# EAGLE board proto (EAGLE 9.3.2), part 1 of 2
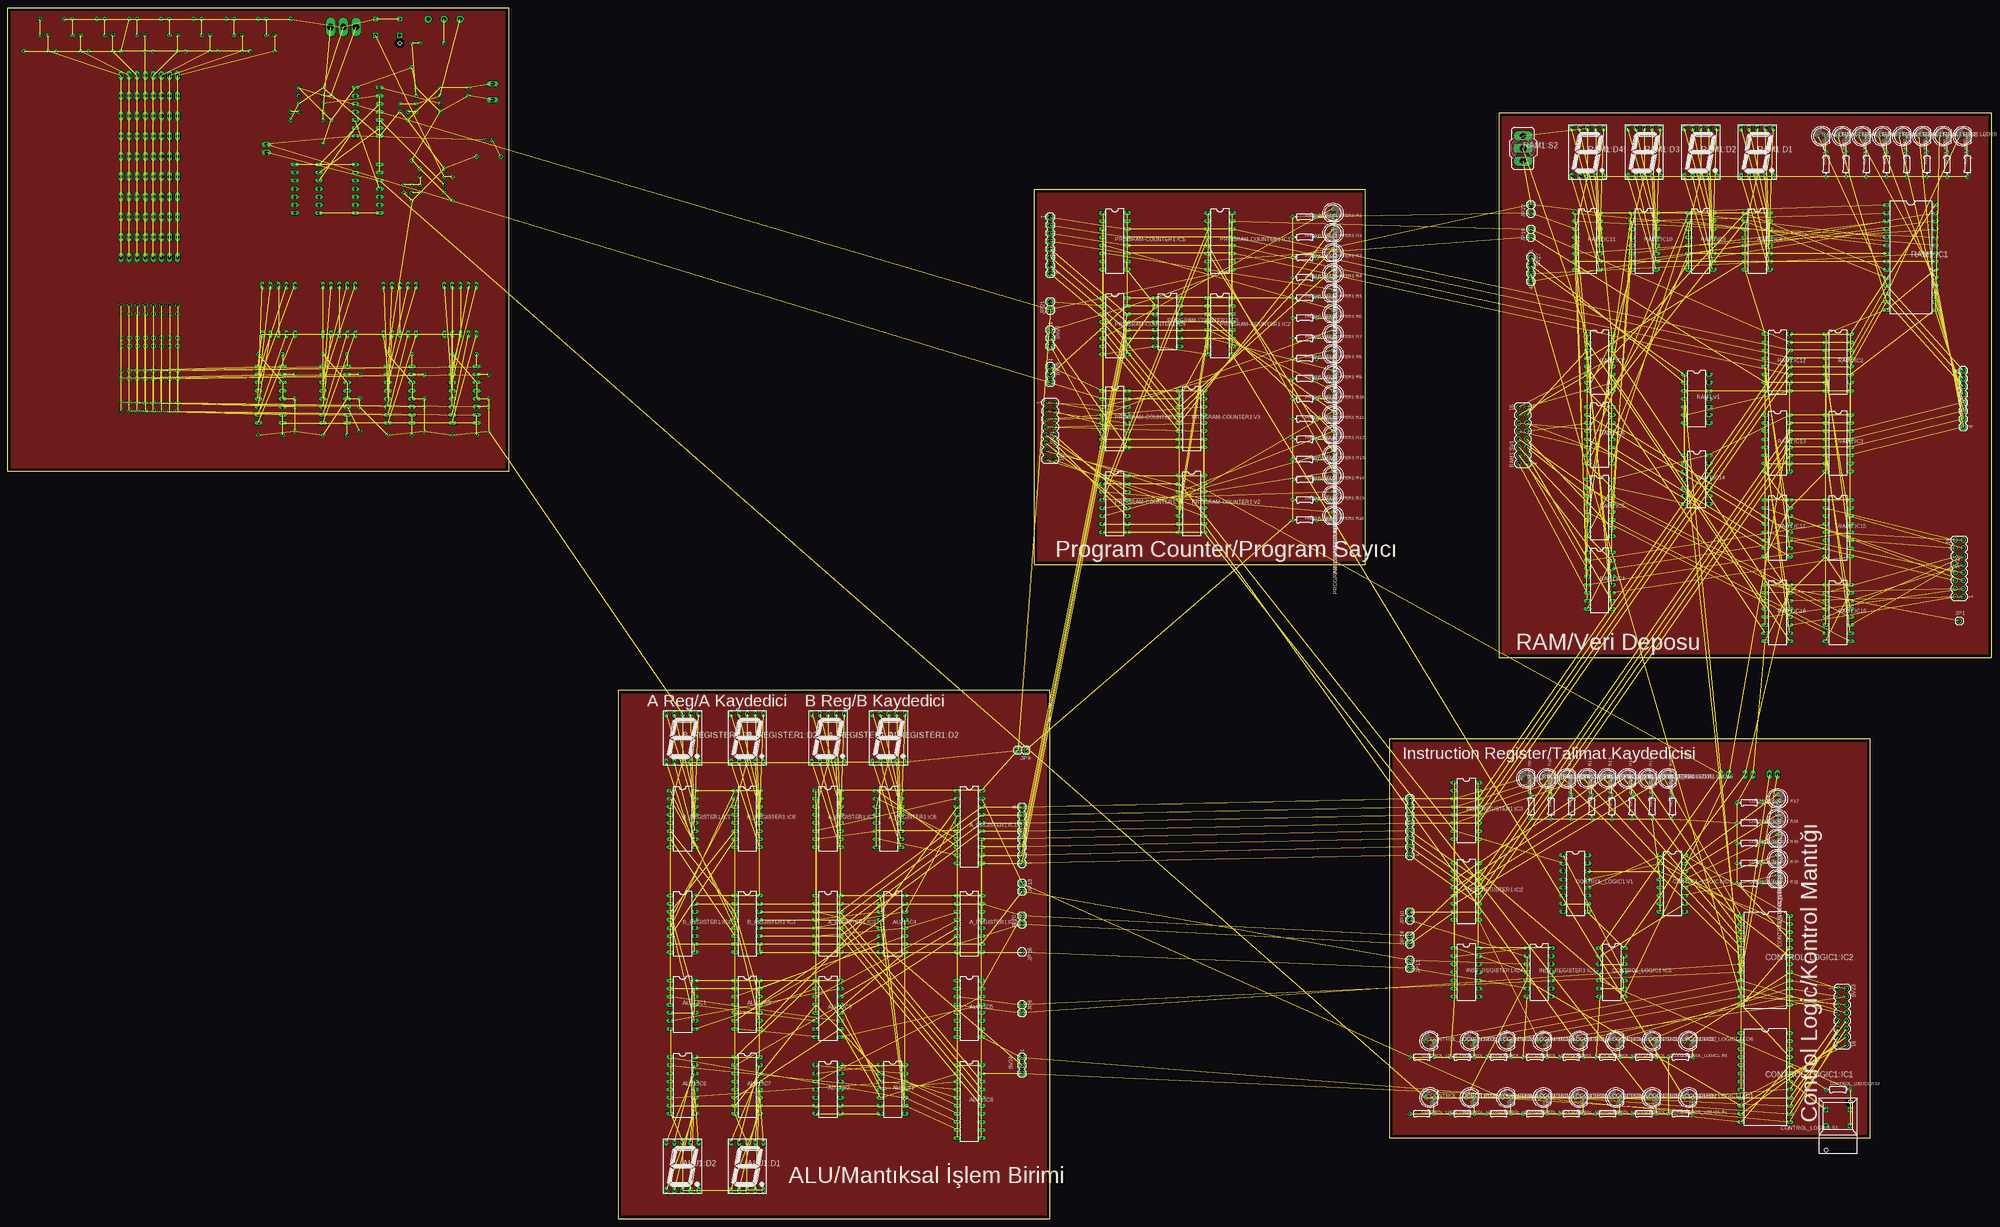
[diagram p0: board, top side]
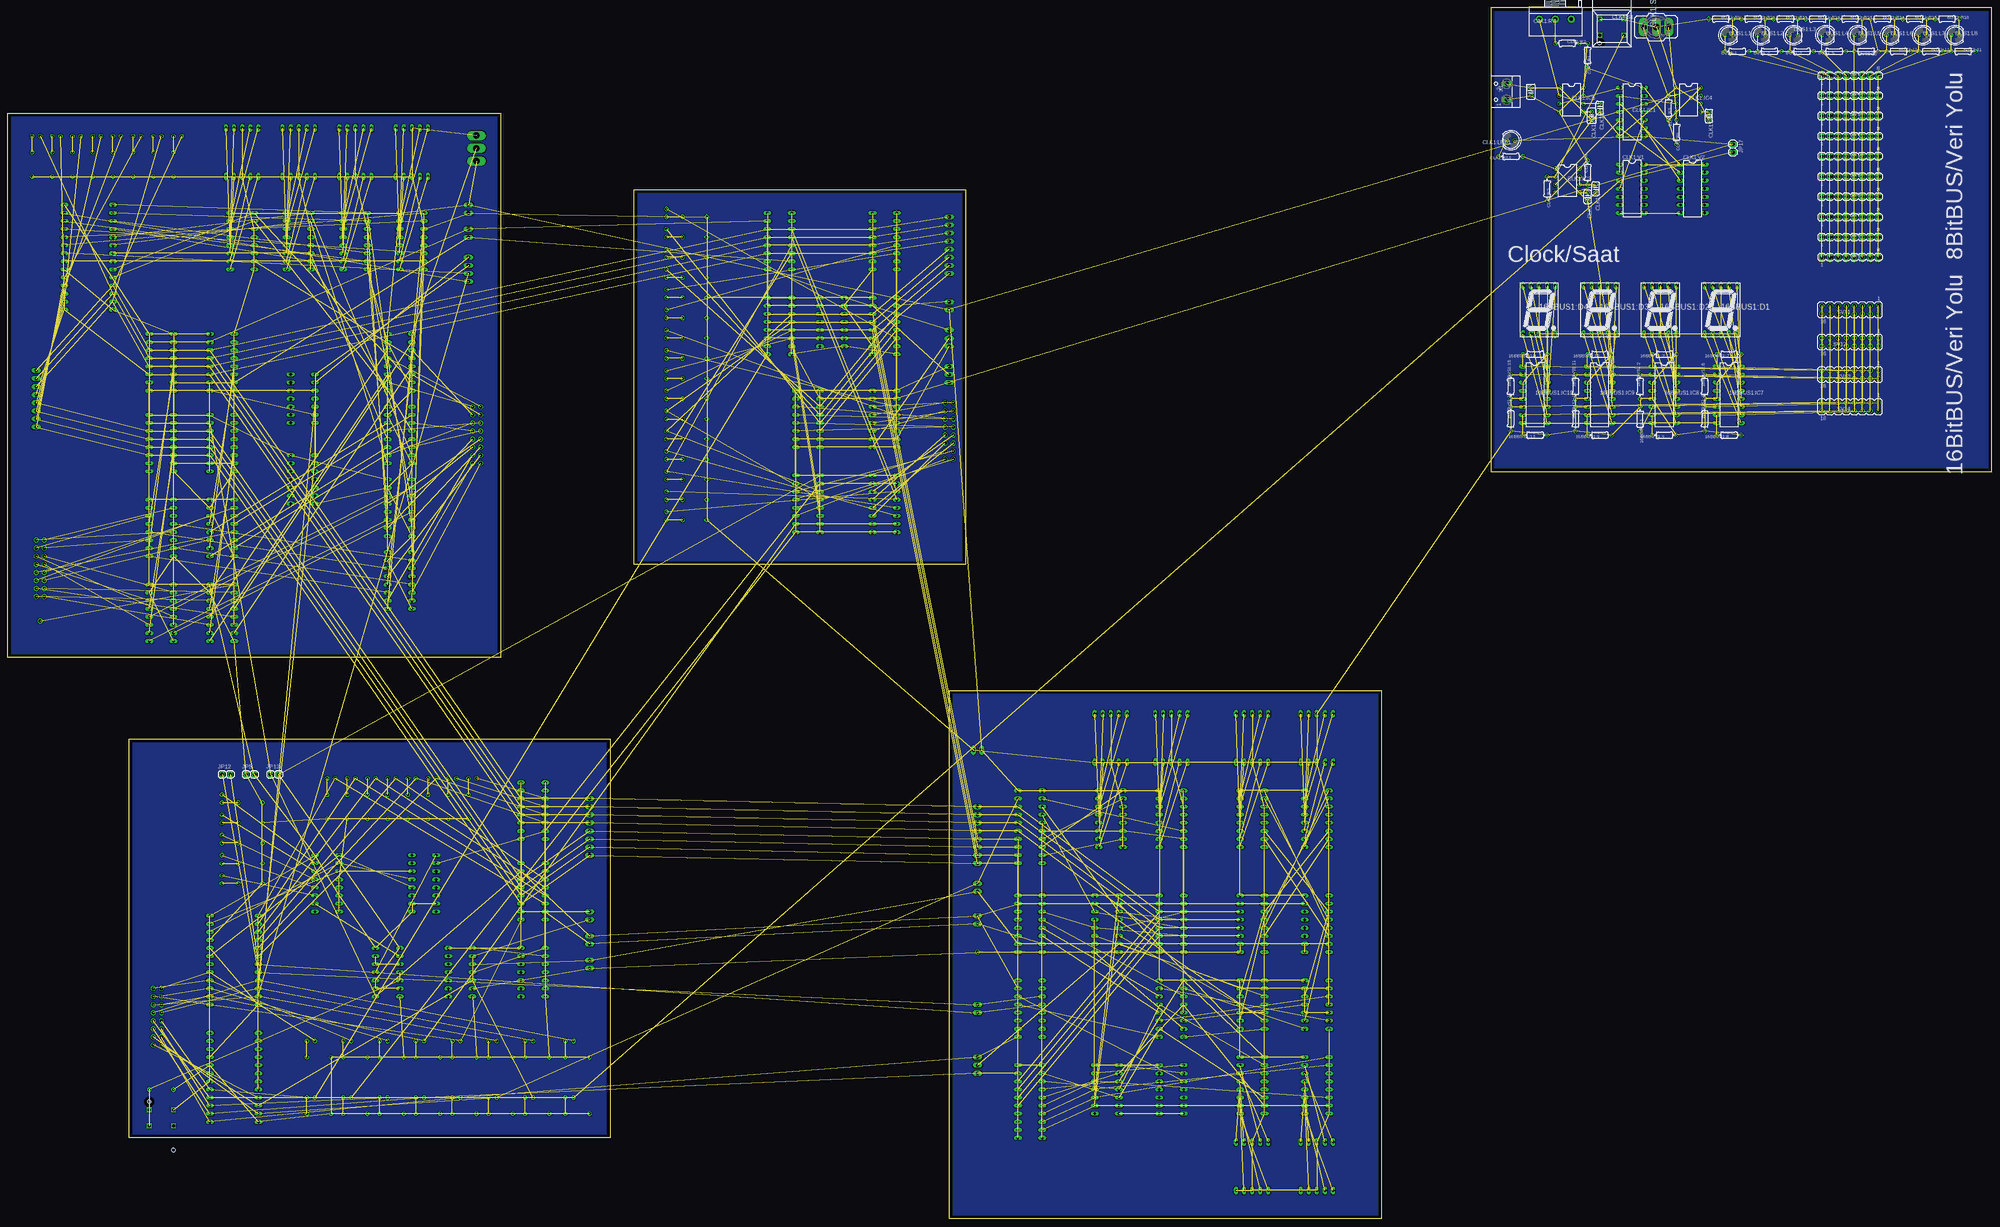
[diagram p1: board, bottom side, seen from below]

Size 623.53 x 380.67 mm. Coordinates in mm from the lower left corner, seen from the top.
Outline: 434.32,25.4 585.43,25.4 585.43,150.8 434.32,150.8 434.32,25.4
Outline: 322.56,205.74 426.68,205.74 426.68,323.52 322.56,323.52 322.56,205.74
Outline: 468.61,176.53 623.53,176.53 623.53,347.65 468.61,347.65 468.61,176.53
Outline: 191.75,0 327.62,0 327.62,166.04 191.75,166.04 191.75,0
Outline: 157.46,234.95 0,234.95 0,380.67 157.46,380.67 157.46,234.95
Copper layers (1*16): Top 0.035mm / dielectric 1.5mm / Bottom 0.035mm
Design rules "default *": minimum track width 9mil, minimum drill 0.35mm, track to track 9mil, track to pad 9mil, pad to pad 6mil, via to via 6mil, smd to smd 6mil, copper to edge 40mil, drill to drill 6mil, minimum pad ring 10mil, minimum via ring 8mil, stop-mask expansion 4mil, vias tented up to drill 0mil, thermal gap 10mil
Net classes: 0 default: width 0.254 mm

## Footprints (pad centres in the part's own frame; a part is rotated, then mirrored left to right if it is on the bottom)
0204/7 = drill 0.813 octagon: 1 -3.81,0; 2 3.81,0
7SEG-13 = drill 0.813 long: 1 -5.08,-7.62; 2 -2.54,-7.62; 3 0,-7.62; 4 2.54,-7.62; 5 5.08,-7.62; 6 5.08,7.62; 7 2.54,7.62; 8 0,7.62; 9 -2.54,7.62; 10 -5.08,7.62
DIL16 = drill 0.813 long: 1 -8.89,-3.81; 2 -6.35,-3.81; 3 -3.81,-3.81; 4 -1.27,-3.81; 5 1.27,-3.81; 6 3.81,-3.81; 7 6.35,-3.81; 8 8.89,-3.81; 9 8.89,3.81; 10 6.35,3.81; 11 3.81,3.81; 12 1.27,3.81; 13 -1.27,3.81; 14 -3.81,3.81; 15 -6.35,3.81; 16 -8.89,3.81
DIL20 = drill 0.813 long: 1 -11.43,-3.81; 2 -8.89,-3.81; 3 -6.35,-3.81; 4 -3.81,-3.81; 5 -1.27,-3.81; 6 1.27,-3.81; 7 3.81,-3.81; 8 6.35,-3.81; 9 8.89,-3.81; 10 11.43,-3.81; 11 11.43,3.81; 12 8.89,3.81; 13 6.35,3.81; 14 3.81,3.81; 15 1.27,3.81; 16 -1.27,3.81; 17 -3.81,3.81; 18 -6.35,3.81; 19 -8.89,3.81; 20 -11.43,3.81
DIL14 = drill 0.813 long: 1 -7.62,-3.81; 2 -5.08,-3.81; 3 -2.54,-3.81; 4 0,-3.81; 5 2.54,-3.81; 6 5.08,-3.81; 7 7.62,-3.81; 8 7.62,3.81; 9 5.08,3.81; 10 2.54,3.81; 11 0,3.81; 12 -2.54,3.81; 13 -5.08,3.81; 14 -7.62,3.81
LED5MM = drill 0.813 octagon: A -1.27,0; K 1.27,0
C025-025X050 = drill 0.813 octagon: 1 -1.27,0; 2 1.27,0
C025-024X044 = drill 0.813 octagon: 1 -1.27,0; 2 1.27,0
DIL08 = drill 0.813 pad 1.27: 1 -3.81,-3.81; 2 -1.27,-3.81; 3 1.27,-3.81; 4 3.81,-3.81; 5 3.81,3.81; 6 1.27,3.81; 7 -1.27,3.81; 8 -3.81,3.81
3RP/1610N = drill 1.2 pad 2.184: 1 -5,0; 2 0,0; 3 5,0
5501 = drill 0.9 pad 1.5 square: 1A 0,3.81; 1B 0,-3.81; NC 5.08,-3.81; NO 5.08,3.81 | hole 1.1: -7.62,3.81; 7.62,-3.81
320-916 = drill 2.007 long: 1 0,4.013; 2 0,0; 3 0,-4.013
DIL24 = drill 0.813 long: 1 -13.97,-7.62; 2 -11.43,-7.62; 3 -8.89,-7.62; 4 -6.35,-7.62; 5 -3.81,-7.62; 6 -1.27,-7.62; 7 1.27,-7.62; 8 3.81,-7.62; 9 6.35,-7.62; 10 8.89,-7.62; 11 11.43,-7.62; 12 13.97,-7.62; 13 13.97,7.62; 14 11.43,7.62; 15 8.89,7.62; 16 6.35,7.62; 17 3.81,7.62; 18 1.27,7.62; 19 -1.27,7.62; 20 -3.81,7.62; 21 -6.35,7.62; 22 -8.89,7.62; 23 -11.43,7.62; 24 -13.97,7.62
1X01 = drill 1.016 octagon: 1 0,0
1X02 = drill 1.016 long: 1 -1.27,0; 2 1.27,0
DIL28-6 = drill 0.813 long: 1 -16.51,-7.62; 2 -13.97,-7.62; 3 -11.43,-7.62; 4 -8.89,-7.62; 5 -6.35,-7.62; 6 -3.81,-7.62; 7 -1.27,-7.62; 8 1.27,-7.62; 9 3.81,-7.62; 10 6.35,-7.62; 11 8.89,-7.62; 12 11.43,-7.62; 13 13.97,-7.62; 14 16.51,-7.62; 15 16.51,7.62; 16 13.97,7.62; 17 11.43,7.62; 18 8.89,7.62; 19 6.35,7.62; 20 3.81,7.62; 21 1.27,7.62; 22 -1.27,7.62; 23 -3.81,7.62; 24 -6.35,7.62; 25 -8.89,7.62; 26 -11.43,7.62; 27 -13.97,7.62; 28 -16.51,7.62
MA08-2 = drill 1.016 octagon: 1 -8.89,-1.27; 2 -8.89,1.27; 3 -6.35,-1.27; 4 -6.35,1.27; 5 -3.81,-1.27; 6 -3.81,1.27; 7 -1.27,-1.27; 8 -1.27,1.27; 9 1.27,-1.27; 10 1.27,1.27; 11 3.81,-1.27; 12 3.81,1.27; 13 6.35,-1.27; 14 6.35,1.27; 15 8.89,-1.27; 16 8.89,1.27
MA08-1 = drill 1.016 long: 1 -8.89,0; 2 -6.35,0; 3 -3.81,0; 4 -1.27,0; 5 1.27,0; 6 3.81,0; 7 6.35,0; 8 8.89,0
MA03-1 = drill 1.016 long: 1 -2.54,0; 2 0,0; 3 2.54,0
MA04-1 = drill 1.016 long: 1 -3.81,0; 2 -1.27,0; 3 1.27,0; 4 3.81,0
W237-102 = drill 1.194 long: 1 -2.5,-1.27; 2 2.5,-1.27

## Placement (x,y rotation side)
16BBUS1:1  10k  [0204/7]  110.47,251.46 270 bottom
16BBUS1:2  10k  [0204/7]  110.47,261.62 90 bottom
16BBUS1:3  10k  [0204/7]  102.85,271.78 180 bottom
16BBUS1:4  10k  [0204/7]  90.15,251.46 90 bottom
16BBUS1:5  10k  [0204/7]  102.85,246.38 180 bottom
16BBUS1:6  10k  [0204/7]  90.15,261.62 90 bottom
16BBUS1:7  10k  [0204/7]  82.53,271.78 180 bottom
16BBUS1:8  10k  [0204/7]  82.53,246.38 180 bottom
16BBUS1:9  10k  [0204/7]  123.17,246.38 180 bottom
16BBUS1:10  10k  [0204/7]  123.17,271.78 180 bottom
16BBUS1:11  10k  [0204/7]  130.79,261.62 90 bottom
16BBUS1:12  10k  [0204/7]  130.79,251.46 90 bottom
16BBUS1:13  10k  [0204/7]  143.49,246.38 180 bottom
16BBUS1:14  10k  [0204/7]  143.49,271.78 180 bottom
16BBUS1:15  10k  [0204/7]  151.11,261.62 90 bottom
16BBUS1:16  10k  [0204/7]  151.11,251.46 90 bottom
16BBUS1:D1  [7SEG-13]  85.07,285.75 0 bottom
16BBUS1:D2  [7SEG-13]  104.12,285.75 0 bottom
16BBUS1:D3  [7SEG-13]  123.17,285.75 0 bottom
16BBUS1:D4  [7SEG-13]  142.22,285.75 0 bottom
16BBUS1:IC7  74LS47N  [DIL16]  82.53,259.08 270 bottom
16BBUS1:IC8  74LS47N  [DIL16]  102.85,259.08 270 bottom
16BBUS1:IC9  74LS47N  [DIL16]  123.17,259.08 270 bottom
16BBUS1:IC10  74LS47N  [DIL16]  143.49,259.08 270 bottom
A_REGISTER1:D1  [7SEG-13]  257.79,151.13 0 top
A_REGISTER1:D2  [7SEG-13]  276.84,151.13 0 top
A_REGISTER1:IC1  74ACT245N  [DIL20]  302.24,123.19 270 top
A_REGISTER1:IC2  74HC173N  [DIL16]  302.24,92.71 270 top
A_REGISTER1:IC3  74HC173N  [DIL16]  257.79,92.71 270 top
A_REGISTER1:IC7  74LS47N  [DIL16]  257.79,125.73 270 top
A_REGISTER1:IC8  74LS47N  [DIL16]  276.84,125.73 270 top
ALU1:D1  [7SEG-13]  232.39,16.51 0 top
ALU1:D2  [7SEG-13]  212.07,16.51 0 top
ALU1:IC1  74LS86N  [DIL14]  212.07,67.31 270 top
ALU1:IC2  74LS86N  [DIL14]  232.39,67.31 270 top
ALU1:IC3  74AC283N  [DIL16]  257.79,66.04 270 top
ALU1:IC4  74AC283N  [DIL16]  278.11,92.71 270 top
ALU1:IC5  74HC173N  [DIL16]  302.24,66.04 270 top
ALU1:IC6  74ACT245N  [DIL20]  302.24,36.83 270 top
ALU1:IC7  74LS47N  [DIL16]  232.39,41.91 270 top
ALU1:IC8  74LS47N  [DIL16]  212.07,41.91 270 top
ALU1:V1  744002N  [DIL14]  278.11,40.64 270 top
ALU1:V2  7409N  [DIL14]  257.79,40.64 270 top
B_REGISTER1:D1  [7SEG-13]  212.07,151.13 0 top
B_REGISTER1:D2  [7SEG-13]  232.39,151.13 0 top
B_REGISTER1:IC2  74HC173N  [DIL16]  212.07,92.71 270 top
B_REGISTER1:IC3  74HC173N  [DIL16]  232.39,92.71 270 top
B_REGISTER1:IC7  74LS47N  [DIL16]  212.07,125.73 270 top
B_REGISTER1:IC8  74LS47N  [DIL16]  232.39,125.73 270 top
BUS1:1  10k  [0204/7]  79.99,367.03 180 bottom
BUS1:2  10k  [0204/7]  69.83,367.03 180 bottom
BUS1:3  10k  [0204/7]  59.67,367.03 180 bottom
BUS1:5  10k  [0204/7]  49.51,367.03 180 bottom
BUS1:11  10k  [0204/7]  8.87,367.03 0 bottom
BUS1:12  10k  [0204/7]  19.03,367.03 0 bottom
BUS1:13  10k  [0204/7]  29.19,367.03 0 bottom
BUS1:15  10k  [0204/7]  39.35,367.03 0 bottom
BUS1:L1  [LED5MM]  82.53,372.11 0 bottom
BUS1:L2  [LED5MM]  72.37,372.11 0 bottom
BUS1:L3  [LED5MM]  62.21,372.11 0 bottom
BUS1:L4  [LED5MM]  52.05,372.11 0 bottom
BUS1:L5  [LED5MM]  41.89,372.11 0 bottom
BUS1:L6  [LED5MM]  31.73,372.11 0 bottom
BUS1:L7  [LED5MM]  21.57,372.11 0 bottom
BUS1:L8  [LED5MM]  11.41,372.11 0 bottom
BUS1:R9  220  [0204/7]  85.07,377.19 0 bottom
BUS1:R10  220  [0204/7]  74.91,377.19 0 bottom
BUS1:R11  220  [0204/7]  64.75,377.19 0 bottom
BUS1:R12  220  [0204/7]  54.59,377.19 0 bottom
BUS1:R13  220  [0204/7]  44.43,377.19 0 bottom
BUS1:R14  220  [0204/7]  34.27,377.19 0 bottom
BUS1:R15  220  [0204/7]  24.11,377.19 0 bottom
BUS1:R16  220  [0204/7]  13.95,377.19 0 bottom
C1  330uf  [C025-025X050]  144.76,354.33 90 bottom
CLK1:C1  1uf  [C025-024X044]  123.17,349.25 270 bottom
CLK1:C2  0.01uF  [C025-025X050]  125.71,346.71 270 bottom
CLK1:C3  0.01uF  [C025-024X044]  126.98,321.31 270 bottom
CLK1:C4  0.1uf  [C025-024X044]  124.44,323.85 270 bottom
CLK1:C5  0.01uF  [C025-024X044]  88.88,346.71 270 bottom
CLK1:IC1  74ALS09N  [DIL14]  113.01,347.98 270 bottom
CLK1:IC3  LM555N  [DIL08]  133.33,326.39 270 bottom
CLK1:IC4  LM555N  [DIL08]  95.23,351.79 270 bottom
CLK1:IC5  LM555N  [DIL08]  132.06,351.79 270 bottom
CLK1:LED1  [LED5MM]  151.11,339.09 180 bottom
CLK1:R1  1k  [0204/7]  126.98,365.76 270 bottom
CLK1:R2  1k  [0204/7]  133.33,369.57 0 bottom
CLK1:R3  1k  [0204/7]  139.68,323.85 270 bottom
CLK1:R4  1k  [0204/7]  126.98,328.93 90 bottom
CLK1:R5  1k  [0204/7]  101.58,349.25 270 bottom
CLK1:R6  1k  [0204/7]  99.04,341.63 270 bottom
CLK1:R7  [3RP/1610N]  137.14,377.19 180 bottom
CLK1:R13  220  [0204/7]  151.11,334.01 180 bottom
CLK1:S1  5501  [5501]  119.36,377.19 270 bottom
CLK1:S2  [320-916]  105.39,374.65 90 bottom
CLK1:V1  7404N  [DIL14]  113.01,323.85 270 bottom
CLK1:V2  7432N  [DIL14]  93.96,323.85 270 bottom
CONTROL_LOGIC1:IC1  [DIL24]  552.43,44.45 270 top
CONTROL_LOGIC1:IC2  [DIL24]  552.43,81.28 270 top
CONTROL_LOGIC1:IC3  74AC138N  [DIL16]  523.22,105.41 270 top
CONTROL_LOGIC1:IC5  74AC00N  [DIL14]  504.17,77.47 270 top
CONTROL_LOGIC1:LED1  [LED5MM]  528.3,38.1 0 top
CONTROL_LOGIC1:LED2  [LED5MM]  516.87,38.1 0 top
CONTROL_LOGIC1:LED3  [LED5MM]  505.44,38.1 0 top
CONTROL_LOGIC1:LED4  [LED5MM]  494.01,38.1 0 top
CONTROL_LOGIC1:LED5  [LED5MM]  482.58,38.1 0 top
CONTROL_LOGIC1:LED6  [LED5MM]  528.3,55.88 0 top
CONTROL_LOGIC1:LED7  [LED5MM]  516.87,55.88 0 top
CONTROL_LOGIC1:LED8  [LED5MM]  505.44,55.88 0 top
CONTROL_LOGIC1:LED9  [LED5MM]  556.24,132.08 270 top
CONTROL_LOGIC1:LED10  [LED5MM]  556.24,125.73 270 top
CONTROL_LOGIC1:LED11  [LED5MM]  556.24,119.38 270 top
CONTROL_LOGIC1:LED12  [LED5MM]  556.24,113.03 270 top
CONTROL_LOGIC1:LED13  [LED5MM]  556.24,106.68 270 top
CONTROL_LOGIC1:LED14  [LED5MM]  471.15,38.1 0 top
CONTROL_LOGIC1:LED15  [LED5MM]  459.72,38.1 0 top
CONTROL_LOGIC1:LED16  [LED5MM]  447.02,38.1 0 top
CONTROL_LOGIC1:LED17  [LED5MM]  494.01,55.88 0 top
CONTROL_LOGIC1:LED18  [LED5MM]  482.58,55.88 0 top
CONTROL_LOGIC1:LED19  [LED5MM]  471.15,55.88 0 top
CONTROL_LOGIC1:LED20  [LED5MM]  459.72,55.88 0 top
CONTROL_LOGIC1:LED21  [LED5MM]  447.02,55.88 0 top
CONTROL_LOGIC1:R1  220  [0204/7]  525.76,33.02 0 top
CONTROL_LOGIC1:R2  220  [0204/7]  514.33,33.02 0 top
CONTROL_LOGIC1:R3  220  [0204/7]  502.9,33.02 0 top
CONTROL_LOGIC1:R4  220  [0204/7]  491.47,33.02 0 top
CONTROL_LOGIC1:R5  220  [0204/7]  480.04,33.02 0 top
CONTROL_LOGIC1:R6  220  [0204/7]  468.61,33.02 0 top
CONTROL_LOGIC1:R7  220  [0204/7]  457.18,33.02 0 top
CONTROL_LOGIC1:R8  220  [0204/7]  444.48,33.02 0 top
CONTROL_LOGIC1:R9  220  [0204/7]  525.76,50.8 0 top
CONTROL_LOGIC1:R10  220  [0204/7]  514.33,50.8 0 top
CONTROL_LOGIC1:R11  220  [0204/7]  502.9,50.8 0 top
CONTROL_LOGIC1:R12  220  [0204/7]  491.47,50.8 0 top
CONTROL_LOGIC1:R13  220  [0204/7]  480.04,50.8 0 top
CONTROL_LOGIC1:R14  220  [0204/7]  468.61,50.8 0 top
CONTROL_LOGIC1:R15  220  [0204/7]  457.18,50.8 0 top
CONTROL_LOGIC1:R16  220  [0204/7]  444.48,50.8 0 top
CONTROL_LOGIC1:R17  220  [0204/7]  547.35,130.81 0 top
CONTROL_LOGIC1:R18  220  [0204/7]  547.35,124.46 0 top
CONTROL_LOGIC1:R19  220  [0204/7]  547.35,118.11 0 top
CONTROL_LOGIC1:R20  220  [0204/7]  547.35,111.76 0 top
CONTROL_LOGIC1:R21  220  [0204/7]  547.35,105.41 0 top
CONTROL_LOGIC1:R22  220  [0204/7]  575.29,40.64 0 top
CONTROL_LOGIC1:S1  5501  [5501]  575.29,29.21 90 top
CONTROL_LOGIC1:V1  74161N  [DIL16]  492.74,105.41 270 top
INST_REGISTER1:IC1  74ALS09N  [DIL14]  481.31,77.47 270 top
INST_REGISTER1:IC2  74HC173N  [DIL16]  458.45,102.87 270 top
INST_REGISTER1:IC3  74HC173N  [DIL16]  458.45,128.27 270 top
INST_REGISTER1:IC4  74AC04N  [DIL14]  458.45,77.47 270 top
INST_REGISTER1:LED9  [LED5MM]  477.5,138.43 0 top
INST_REGISTER1:LED10  [LED5MM]  483.85,138.43 0 top
INST_REGISTER1:LED11  [LED5MM]  490.2,138.43 0 top
INST_REGISTER1:LED12  [LED5MM]  496.55,138.43 0 top
INST_REGISTER1:LED13  [LED5MM]  502.9,138.43 0 top
INST_REGISTER1:LED14  [LED5MM]  509.25,138.43 0 top
INST_REGISTER1:LED15  [LED5MM]  515.6,138.43 0 top
INST_REGISTER1:LED16  [LED5MM]  521.95,138.43 0 top
INST_REGISTER1:R9  220  [0204/7]  478.77,129.54 90 top
INST_REGISTER1:R10  220  [0204/7]  485.12,129.54 90 top
INST_REGISTER1:R11  220  [0204/7]  491.47,129.54 90 top
INST_REGISTER1:R12  220  [0204/7]  497.82,129.54 90 top
INST_REGISTER1:R13  220  [0204/7]  504.17,129.54 90 top
INST_REGISTER1:R14  220  [0204/7]  510.52,129.54 90 top
INST_REGISTER1:R15  220  [0204/7]  516.87,129.54 90 top
INST_REGISTER1:R16  220  [0204/7]  523.22,129.54 90 top
JP1  [1X01]  613.39,187.96 0 top
JP5  [1X02]  547.35,139.7 0 bottom
JP8  [1X02]  318.75,66.04 270 top
JP9  [1X02]  318.75,147.32 180 top
JP10  [1X02]  440.67,95.25 90 top
JP11  [1X02]  440.67,80.01 270 top
JP12  [1X02]  554.97,139.7 0 bottom
JP13  [1X02]  539.73,139.7 0 bottom
JP14  [1X02]  440.67,87.63 90 top
JP16  [1X02]  478.77,309.88 90 top
JP17  [1X02]  81.26,336.55 270 bottom
JP18  [1X01]  318.75,83.82 270 top
JP19  [1X02]  318.75,104.14 270 top
JP20  [1X02]  318.75,93.98 90 top
JP21  [1X02]  327.64,287.02 90 top
JP22  [1X02]  478.77,317.5 90 top
PROGRAM-COUNTER1:IC1  74HC173N  [DIL16]  380.98,307.34 270 top
PROGRAM-COUNTER1:IC2  74HC173N  [DIL16]  380.98,280.67 270 top
PROGRAM-COUNTER1:IC3  74AC04N  [DIL14]  364.47,281.94 270 top
PROGRAM-COUNTER1:IC4  74HC173N  [DIL16]  347.96,280.67 270 top
PROGRAM-COUNTER1:IC5  74HC173N  [DIL16]  347.96,307.34 270 top
PROGRAM-COUNTER1:LED1  [LED5MM]  416.54,316.23 270 top
PROGRAM-COUNTER1:LED2  [LED5MM]  416.54,309.88 270 top
PROGRAM-COUNTER1:LED3  [LED5MM]  416.54,303.53 270 top
PROGRAM-COUNTER1:LED4  [LED5MM]  416.54,297.18 270 top
PROGRAM-COUNTER1:LED5  [LED5MM]  416.54,290.83 270 top
PROGRAM-COUNTER1:LED6  [LED5MM]  416.54,284.48 270 top
PROGRAM-COUNTER1:LED7  [LED5MM]  416.54,278.13 270 top
PROGRAM-COUNTER1:LED8  [LED5MM]  416.54,271.78 270 top
PROGRAM-COUNTER1:LED9  [LED5MM]  416.54,265.43 270 top
PROGRAM-COUNTER1:LED10  [LED5MM]  416.54,259.08 270 top
PROGRAM-COUNTER1:LED11  [LED5MM]  416.54,252.73 270 top
PROGRAM-COUNTER1:LED12  [LED5MM]  416.54,246.38 270 top
PROGRAM-COUNTER1:LED13  [LED5MM]  416.54,240.03 270 top
PROGRAM-COUNTER1:LED14  [LED5MM]  416.54,233.68 270 top
PROGRAM-COUNTER1:LED15  [LED5MM]  416.54,227.33 270 top
PROGRAM-COUNTER1:LED16  [LED5MM]  416.54,220.98 270 top
PROGRAM-COUNTER1:R1  220  [0204/7]  407.65,314.96 0 top
PROGRAM-COUNTER1:R2  220  [0204/7]  407.65,308.61 0 top
PROGRAM-COUNTER1:R3  220  [0204/7]  407.65,302.26 0 top
PROGRAM-COUNTER1:R4  220  [0204/7]  407.65,295.91 0 top
PROGRAM-COUNTER1:R5  220  [0204/7]  407.65,289.56 0 top
PROGRAM-COUNTER1:R6  220  [0204/7]  407.65,283.21 0 top
PROGRAM-COUNTER1:R7  220  [0204/7]  407.65,276.86 0 top
PROGRAM-COUNTER1:R8  220  [0204/7]  407.65,270.51 0 top
PROGRAM-COUNTER1:R9  220  [0204/7]  407.65,264.16 0 top
PROGRAM-COUNTER1:R10  220  [0204/7]  407.65,257.81 0 top
PROGRAM-COUNTER1:R11  220  [0204/7]  407.65,251.46 0 top
PROGRAM-COUNTER1:R12  220  [0204/7]  407.65,245.11 0 top
PROGRAM-COUNTER1:R13  220  [0204/7]  407.65,238.76 0 top
PROGRAM-COUNTER1:R14  220  [0204/7]  407.65,232.41 0 top
PROGRAM-COUNTER1:R15  220  [0204/7]  407.65,226.06 0 top
PROGRAM-COUNTER1:R16  220  [0204/7]  407.65,219.71 0 top
PROGRAM-COUNTER1:V1  74161N  [DIL16]  347.96,224.79 270 top
PROGRAM-COUNTER1:V2  74161N  [DIL16]  372.09,224.79 270 top
PROGRAM-COUNTER1:V3  74161N  [DIL16]  372.09,251.46 270 top
PROGRAM-COUNTER1:V4  74161N  [DIL16]  347.96,251.46 270 top
RAM1:D1  [7SEG-13]  549.89,335.28 0 top
RAM1:D2  [7SEG-13]  532.11,335.28 0 top
RAM1:D3  [7SEG-13]  514.33,335.28 0 top
RAM1:D4  [7SEG-13]  496.55,335.28 0 top
RAM1:IC1  CY62256LL-PC  [DIL28-6]  598.15,302.26 270 top
RAM1:IC2  74HC173N  [DIL16]  575.29,269.24 270 top
RAM1:IC3  74HC173N  [DIL16]  575.29,243.84 270 top
RAM1:IC4  74AC157N  [DIL16]  500.36,200.66 270 top
RAM1:IC5  74AC157N  [DIL16]  500.36,223.52 270 top
RAM1:IC6  74AC157N  [DIL16]  500.36,246.38 270 top
RAM1:IC7  74AC157N  [DIL16]  500.36,269.24 270 top
RAM1:IC8  74LS47N  [DIL16]  549.89,307.34 270 top
RAM1:IC9  74LS47N  [DIL16]  532.11,307.34 270 top
RAM1:IC10  74LS47N  [DIL16]  514.33,307.34 270 top
RAM1:IC11  74LS47N  [DIL16]  496.55,307.34 270 top
RAM1:IC12  74HC173N  [DIL16]  556.24,269.24 270 top
RAM1:IC13  74HC173N  [DIL16]  556.24,243.84 270 top
RAM1:IC14  74AC04N  [DIL14]  530.84,232.41 270 top
RAM1:IC15  74AC157N  [DIL16]  575.29,217.17 270 top
RAM1:IC16  74AC157N  [DIL16]  575.29,190.5 270 top
RAM1:IC17  74AC157N  [DIL16]  556.24,217.17 270 top
RAM1:IC18  74AC157N  [DIL16]  556.24,190.5 270 top
RAM1:LED9  [LED5MM]  570.21,340.36 0 top
RAM1:LED10  [LED5MM]  614.66,340.36 0 top
RAM1:LED11  [LED5MM]  576.56,340.36 0 top
RAM1:LED12  [LED5MM]  608.31,340.36 0 top
RAM1:LED13  [LED5MM]  601.96,340.36 0 top
RAM1:LED14  [LED5MM]  595.61,340.36 0 top
RAM1:LED15  [LED5MM]  589.26,340.36 0 top
RAM1:LED16  [LED5MM]  582.91,340.36 0 top
RAM1:R9  220  [0204/7]  571.48,331.47 90 top
RAM1:R10  220  [0204/7]  615.93,331.47 90 top
RAM1:R11  220  [0204/7]  577.83,331.47 90 top
RAM1:R12  220  [0204/7]  609.58,331.47 90 top
RAM1:R13  220  [0204/7]  603.23,331.47 90 top
RAM1:R14  220  [0204/7]  596.88,331.47 90 top
RAM1:R15  220  [0204/7]  590.53,331.47 90 top
RAM1:R16  220  [0204/7]  584.18,331.47 90 top
RAM1:S2  [320-916]  476.23,336.55 0 top
RAM1:SV1  [MA08-2]  476.23,246.38 90 top
RAM1:V1  7409N  [DIL14]  530.84,257.81 270 top
SV1  [MA08-1]  44.43,359.41 0 bottom
SV2  [MA08-1]  44.43,340.36 0 bottom
SV3  [MA08-1]  44.43,346.71 0 bottom
SV4  [MA08-1]  44.43,353.06 0 bottom
SV5  [MA08-1]  44.43,302.26 0 bottom
SV6  [MA08-1]  44.43,308.61 0 bottom
SV7  [MA08-1]  44.43,314.96 0 bottom
SV8  [MA08-1]  44.43,321.31 0 bottom
SV9  [MA08-1]  44.43,327.66 0 bottom
SV10  [MA08-1]  44.43,334.01 0 bottom
SV11  [MA08-2]  44.43,285.75 180 bottom
SV12  [MA08-2]  44.43,275.59 180 bottom
SV13  [MA08-2]  44.43,265.43 180 bottom
SV14  [MA08-2]  44.43,255.27 180 bottom
SV15  [MA08-1]  327.64,306.07 270 top
SV16  [MA08-1]  614.66,257.81 270 top
SV17  [MA08-1]  440.67,123.19 90 top
SV18  [MA08-1]  318.75,120.65 90 top
SV21  [MA08-2]  327.64,247.65 270 top
SV22  [MA08-2]  613.39,204.47 90 top
SV23  [MA08-2]  576.56,63.5 270 top
SV24  [MA03-1]  318.75,48.26 270 top
SV25  [MA03-1]  327.64,265.43 270 top
SV26  [MA03-1]  327.64,276.86 270 top
SV27  [MA04-1]  478.77,298.45 270 top
X1  [W237-102]  153.65,354.33 90 bottom

## Library data of the parts
16BBUS1:1-16BBUS1:16 BUS1:1-BUS1:3 BUS1:5 BUS1:11-BUS1:13 BUS1:15 BUS1:R9-BUS1:R16 CLK1:R1-CLK1:R6 CLK1:R13 CONTROL_LOGIC1:R1-CONTROL_LOGIC1:R22 INST_REGISTER1:R9-INST_REGISTER1:R16 PROGRAM-COUNTER1:R1-PROGRAM-COUNTER1:R16 RAM1:R9-RAM1:R16 = rcl; SPICEPREFIX: R
16BBUS1:D1-16BBUS1:D4 A_REGISTER1:D1 A_REGISTER1:D2 ALU1:D1 ALU1:D2 B_REGISTER1:D1 B_REGISTER1:D2 RAM1:D1-RAM1:D4 = special
16BBUS1:IC7-16BBUS1:IC10 A_REGISTER1:IC1-A_REGISTER1:IC3 A_REGISTER1:IC7 A_REGISTER1:IC8 ALU1:IC3-ALU1:IC8 B_REGISTER1:IC2 B_REGISTER1:IC3 B_REGISTER1:IC7 B_REGISTER1:IC8 CLK1:IC1 CONTROL_LOGIC1:IC3 CONTROL_LOGIC1:IC5 INST_REGISTER1:IC1-INST_REGISTER1:IC4 PROGRAM-COUNTER1:IC1-PROGRAM-COUNTER1:IC5 RAM1:IC2-RAM1:IC18 = 74xx-eu
ALU1:IC1 ALU1:IC2 = 74xx-us
ALU1:V1 ALU1:V2 CLK1:V1 CLK1:V2 CONTROL_LOGIC1:V1 PROGRAM-COUNTER1:V1-PROGRAM-COUNTER1:V4 RAM1:V1 = 74ttl-din
BUS1:L1-BUS1:L8 CLK1:LED1 CONTROL_LOGIC1:LED1-CONTROL_LOGIC1:LED21 INST_REGISTER1:LED9-INST_REGISTER1:LED16 PROGRAM-COUNTER1:LED1-PROGRAM-COUNTER1:LED16 RAM1:LED9-RAM1:LED16 = led
C1 CLK1:C1-CLK1:C5 = rcl; SPICEPREFIX: C
CLK1:IC3-CLK1:IC5 = linear
CLK1:R7 = pot
CLK1:S1 CLK1:S2 CONTROL_LOGIC1:S1 RAM1:S2 = switch
CONTROL_LOGIC1:IC1 CONTROL_LOGIC1:IC2 = memory
JP1 JP5 JP8-JP14 JP16-JP22 = pinhead
RAM1:IC1 = memory-sram
RAM1:SV1 SV1-SV18 SV21-SV27 = con-lstb; OC_FARNELL: unknown; OC_NEWARK: unknown
X1 = con-wago-500; MPN: 237-102; OC_FARNELL: unknown; OC_NEWARK: 70K9898